# EAGLE board MCP3424 Temperature board (EAGLE 7.5.0)
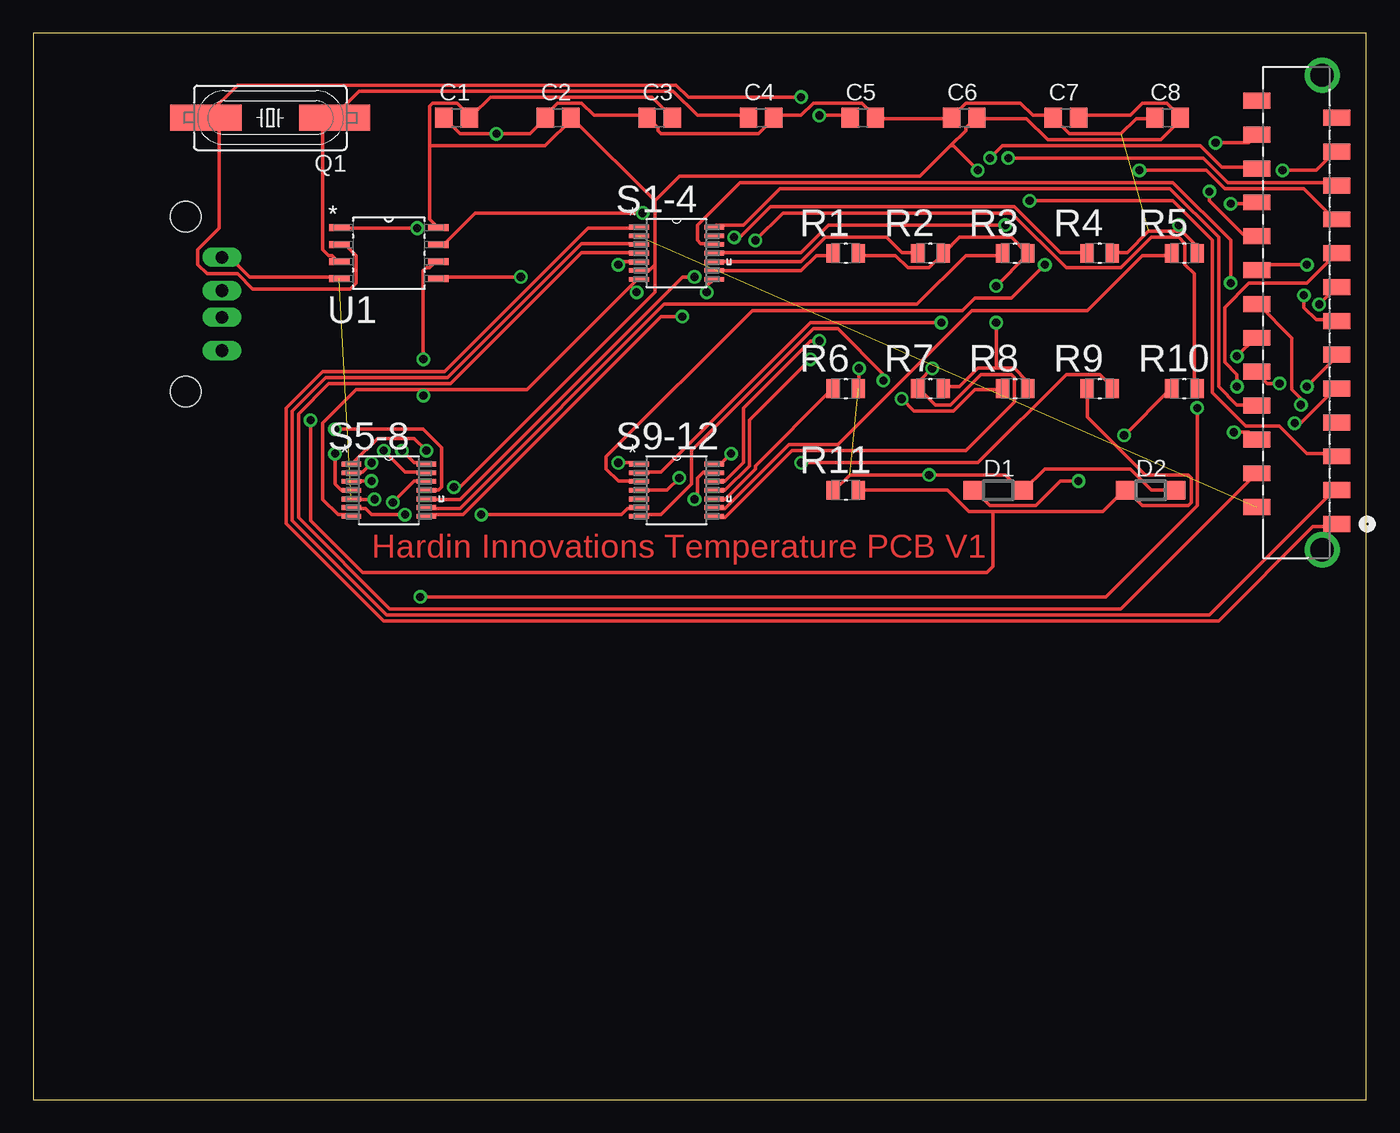
[diagram p0: board, top side]
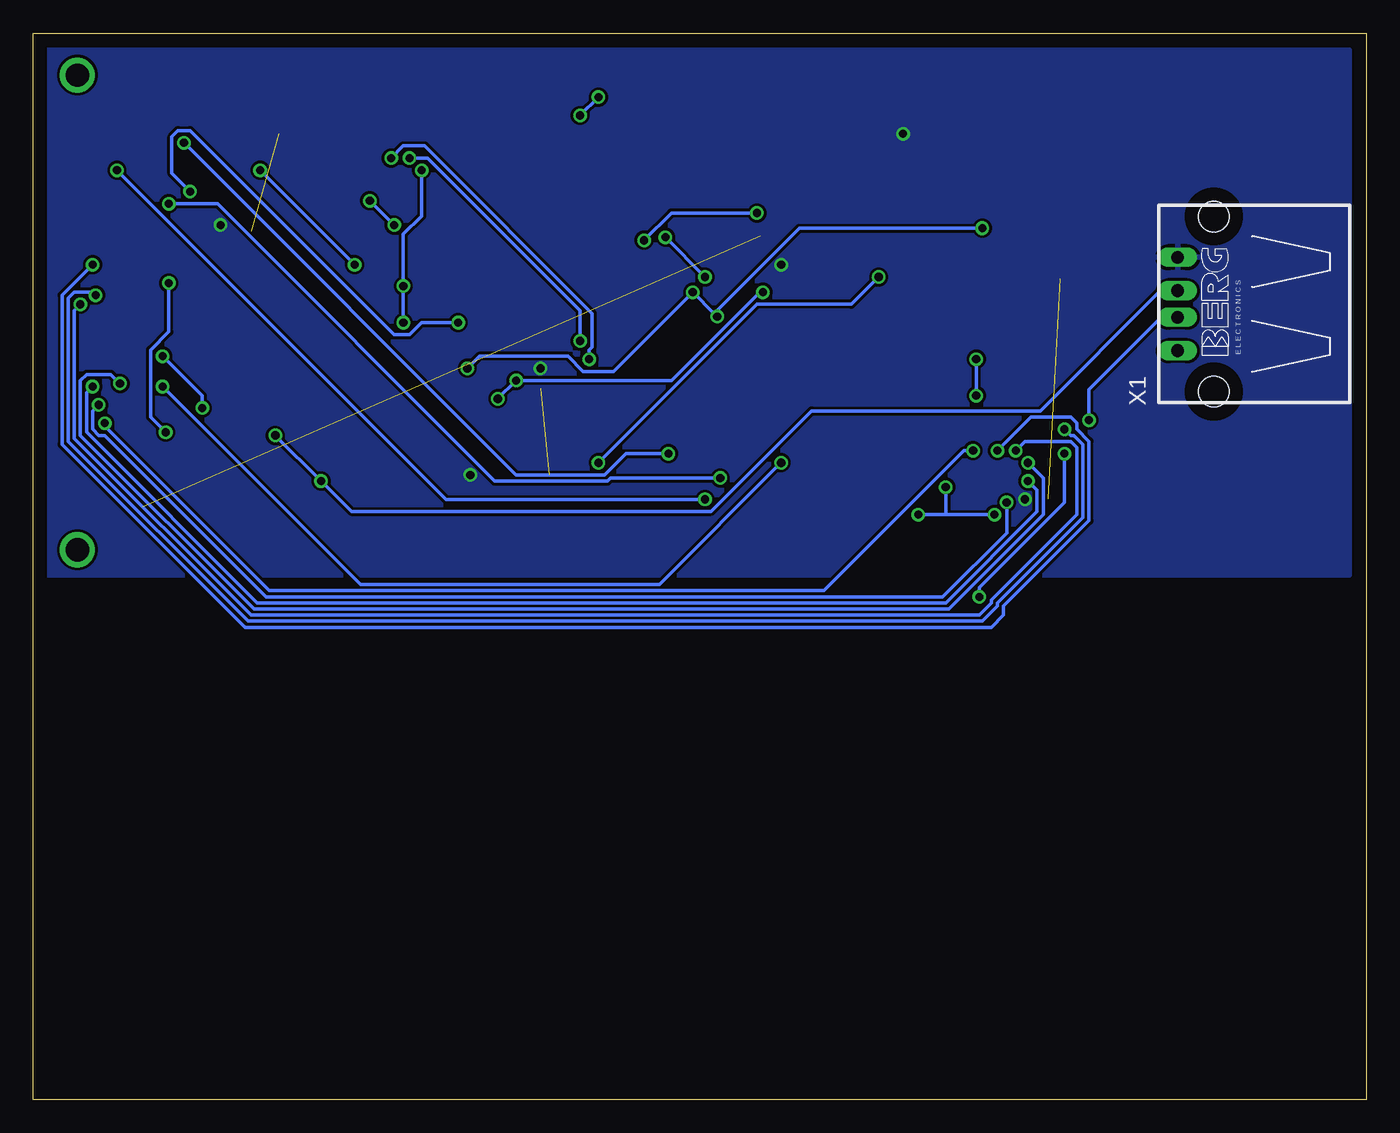
[diagram p1: board, bottom side, seen from below]

Size 100 x 80 mm. Coordinates in mm from the lower left corner, seen from the top.
Outline: 0,0 100,0 100,80 0,80 0,0
Copper layers (1*16): Top 0.035mm / dielectric 1.5mm / Bottom 0.035mm
Design rules "default": minimum track width 10mil, minimum drill 24mil, track to track 8mil, track to pad 8mil, pad to pad 8mil, via to via 8mil, smd to smd 8mil, copper to edge 40mil, drill to drill 8mil, minimum pad ring 10mil, minimum via ring 8mil, stop-mask expansion 4mil, vias tented up to drill 0mil, thermal gap 10mil

## Footprints (pad centres in the part's own frame; a part is rotated, then mirrored left to right if it is on the bottom)
C0805 = smd 1.3 x 1.5: 1 -0.95,0; 2 0.95,0
SOD123 = smd 1.4 x 1.4: A 1.9,0; C -1.9,0
MOLEX_90814-3926 = smd 1.194 x 2.007: 1 0,0; 2 1.27,5.994; 3 2.54,0; 4 3.81,5.994; 5 5.08,0; 6 6.35,5.994; 7 7.62,0; 8 8.89,5.994; 9 10.16,0; 10 11.43,5.994; 11 12.7,0; 12 13.97,5.994; 13 15.24,0; 14 16.51,5.994; 15 17.78,0; 16 19.05,5.994; 17 20.32,0; 18 21.59,5.994; 19 22.86,0; 20 24.13,5.994; 21 25.4,0; 22 26.67,5.994; 23 27.94,0; 24 29.21,5.994; 25 30.48,0; 26 31.75,5.994 | drill 1.753: 27 -1.93,1.092; 28 33.68,1.092
HC49UP = smd 5.334 x 1.93: 1 -4.826,0; 2 4.826,0
RESC2013X65N = smd 1.016 x 1.397: 1 -0.94,0; 2 0.94,0
SOP65P640X120-14N = smd 1.473 x 0.356: 1 -2.819,1.956; 2 -2.819,1.295; 3 -2.819,0.66; 4 -2.819,0; 5 -2.819,-0.66; 6 -2.819,-1.295; 7 -2.819,-1.956; 8 2.819,-1.956; 9 2.819,-1.295; 10 2.819,-0.66; 11 2.819,0; 12 2.819,0.66; 13 2.819,1.295; 14 2.819,1.956
SOIC127P798X216-8N = smd 1.549 x 0.533: 1 -3.708,1.905; 2 -3.708,0.635; 3 -3.708,-0.635; 4 -3.708,-1.905; 5 3.708,-1.905; 6 3.708,-0.635; 7 3.708,0.635; 8 3.708,1.905
PN87520 = drill 0.95 long: 1 -3.5,2.71; 2 -1,2.71; 3 1,2.71; 4 3.5,2.71 | hole 2.3: -6.57,0; 6.57,0

## Placement (x,y rotation side)
C1  .1uF  [C0805]  31.75,73.66 0 top
C2  .1uF  [C0805]  39.37,73.66 0 top
C3  .1uF  [C0805]  46.99,73.66 0 top
C4  22pF  [C0805]  54.61,73.66 0 top
C5  22pF  [C0805]  62.23,73.66 0 top
C6  10uF  [C0805]  69.85,73.66 0 top
C7  10uF  [C0805]  77.47,73.66 0 top
C8  10uF  [C0805]  85.09,73.66 0 top
D1  3.6V  [SOD123]  72.39,45.72 0 top
D2  3.6V  [SOD123]  83.82,45.72 0 top
HEADER  90814-3926  [MOLEX_90814-3926]  97.79,43.18 90 top
Q1  12Mhz  [HC49UP]  17.78,73.66 180 top
R1  10K Ohms  [RESC2013X65N]  60.96,63.5 0 top
R2  10K Ohms  [RESC2013X65N]  67.31,63.5 0 top
R3  10K Ohms  [RESC2013X65N]  73.66,63.5 0 top
R4  10K Ohms  [RESC2013X65N]  80.01,63.5 0 top
R5  10K Ohms  [RESC2013X65N]  86.36,63.5 0 top
R6  10K Ohms  [RESC2013X65N]  60.96,53.34 0 top
R7  10K Ohms  [RESC2013X65N]  67.31,53.34 0 top
R8  10K Ohms  [RESC2013X65N]  73.66,53.34 0 top
R9  68 Ohms  [RESC2013X65N]  80.01,53.34 0 top
R10  68 Ohms  [RESC2013X65N]  86.36,53.34 0 top
R11  2.2K Ohms  [RESC2013X65N]  60.96,45.72 0 top
S1-4  MCP3424-E/ST  [SOP65P640X120-14N]  48.26,63.5 0 top
S5-8  MCP3424-E/ST  [SOP65P640X120-14N]  26.67,45.72 0 top
S9-12  MCP3424-E/ST  [SOP65P640X120-14N]  48.26,45.72 0 top
U1  ATTINY45-20SU  [SOIC127P798X216-8N]  26.67,63.5 0 top
X1  5V  [PN87520]  11.43,59.69 90 bottom

## Library data of the parts
C1-C8 D1 D2 = sym
HEADER = Molex_By_element14_Batch_1; MPN: 90814-3926; OC_FARNELL: 1757067; OC_NEWARK: 34R6253; PACKAGE: CONN-26POS; SUPPLIER: Molex
Q1 = crystal; OC_FARNELL: unknown; OC_NEWARK: unknown
R1-R11 = Vishay_By_element14_Batch_1; MPN: P0805Z1002WNT0079; OC_FARNELL: 1791003; OC_NEWARK: 70R0101; SUPPLIER: Vishay; TOLERANCE: ± 0.05 %; WATTAGE: 200mW
S1-4 S5-8 S9-12 = Microchip_By_element14_Batch_1; MPN: MCP3424-E/ST; OC_FARNELL: 1630423; OC_NEWARK: 54M4872; PACKAGE: SOP-14; SUPPLIER: Microchip
U1 = Atmel_By_element14_Batch_1-00; MPN: ATTINY45-20SU; OC_FARNELL: 1288353; OC_NEWARK: 23M5073; PACKAGE: SOIC-8; SUPPLIER: Atmel
X1 = con-berg; OC_FARNELL: unknown; OC_NEWARK: unknown

## Nets
GND: C1.1 C2.1 C3.1 C4.2 C5.2 C6.1 C7.1 C8.1 D1.A D2.A R4.2 R5.2 R6.2 R11.1 S1-4.5 S5-8.5 U1.4 X1.4
N$1: HEADER.1 S1-4.1
N$2: S9-12.5
N$3: R1.1 S1-4.9
N$4: R2.1 S1-4.10
N$5: R3.1 S5-8.9
N$6: R4.1 S5-8.10
N$7: HEADER.3 S1-4.3
N$8: R5.1 S9-12.9
N$9: R6.1 S9-12.10
N$10: HEADER.5 S1-4.11
N$11: S1-4.13
N$12: HEADER.2 S1-4.2
N$13: HEADER.4 S1-4.4
N$14: HEADER.6 S1-4.12
N$15: HEADER.8 S1-4.14
N$16: HEADER.9 S5-8.1
N$17: HEADER.11 S5-8.3
N$18: HEADER.13 S5-8.11
N$19: HEADER.15 S5-8.13
N$20: HEADER.10 S5-8.2
N$21: HEADER.16 S5-8.14
N$22: HEADER.14 S5-8.12
N$23: HEADER.12 S5-8.4
N$24: HEADER.17 S9-12.1
N$25: HEADER.19 S9-12.3
N$26: HEADER.23 S9-12.13
N$27: HEADER.21 S9-12.11
N$28: HEADER.24 S9-12.14
N$29: HEADER.22 S9-12.12
N$30: HEADER.20 S9-12.4
N$31: HEADER.18 S9-12.2
N$33: R9.2 U1.5
N$34: R10.2 U1.7
N$35: D2.C R9.1 R11.2 X1.2
N$36: D1.C R10.1 X1.3
N$38: C4.1 Q1.1 U1.3
N$39: C5.1 Q1.2 U1.2
SCL: R7.1 S1-4.8 S5-8.8 S9-12.8 U1.1
SDA: R8.1 S1-4.7 S5-8.7 S9-12.7 U1.6
VDD: C1.2 C2.2 C3.2 C6.2 C7.2 C8.2 R1.2 R2.2 R3.2 R7.2 R8.2 S1-4.6 S5-8.6 S9-12.6 U1.8

## Tracks (layer width: path | path; a pad name or v marks a point on that pad's centre or on a via)
GND  (via drill 0.61)  (3 unrouted)
  Top 0.254: C1.1 30.86,73.61 32,72.47 v34.75,72.47 37.26,72.47 38.41,73.61 C2.1 38.41,73.84 39.32,74.75 41.15,74.75 42.06,73.84 45.95,73.84 C3.1 46.18,73.61 46.86,72.92 46.86,72.69 47.09,72.47 54.41,72.47 55.55,73.61 C4.2 55.78,73.84 57.61,73.84 58.52,74.75 62.18,74.75 63.09,73.84 C5.2 63.32,73.61 68.81,73.61 C6.1 69.04,73.84 69.95,74.75 74.07,74.75 74.98,73.84 76.35,73.84 C7.1 76.58,73.61 77.72,72.47 81.61,72.47 82.75,73.61 84.12,73.61 C8.1 | R11.1 60.12,45.72 61.27,46.86 v67.21,46.86 72.92,46.86 74.07,45.72 D1.A 75.89,47.32 82.3,47.32 83.9,45.72 D2.A | 85.95,65.15 86.18,65.15 87.1,64.24 87.1,63.55 R5.2 | 85.95,65.15 83.67,65.15 82.07,63.55 81.15,63.55 R4.2 | v61.95,54.86 61.95,53.49 R6.2 | v25.6,45.03 24,45.03 S5-8.5 | v43.89,62.64 44.12,62.87 45.26,62.87 S1-4.5 | U1.4 22.86,61.72 16.23,61.72 14.86,63.09 14.17,63.09 X1.4 | v85.95,65.61 85.95,65.15
  pour Bottom: 1.27,78.74 99.06,78.74 99.06,39.37 1.27,39.37
N$1
  Top 0.254: S1-4.1 45.26,65.38 41.6,65.38 30.86,54.63 21.72,54.63 18.97,51.89 18.97,43.2 26.29,35.89 88.92,35.89 96.01,42.98 97.61,42.98 HEADER.1
N$3
  Top 0.254: R1.1 59.89,63.32 58.75,63.32 57.61,62.18 51.21,62.18 S1-4.9
N$4
  Top 0.254: R2.1 66.29,63.55 65.15,63.55 64.01,64.69 59.44,64.69 57.61,62.87 51.21,62.87 S1-4.10
N$5
  Top 0.254: R3.1 72.69,63.32 69.95,63.32 66.29,59.66 47.32,59.66 32,44.35 29.49,44.35 S5-8.9
N$6  (via drill 0.61)
  Top 0.254: v52.58,64.69 53.03,64.69 55.32,66.98 73.61,66.98 77.04,63.55 78.87,63.55 R4.1 | v49.61,61.72 48.69,61.72 32,45.03 29.49,45.03 S5-8.10
  Bottom 0.254: v49.61,61.72 v52.58,64.69
N$7
  Top 0.254: S1-4.3 45.26,64.24 41.15,64.24 31.09,54.18 21.95,54.18 19.43,51.66 19.43,43.43 26.52,36.35 88.24,36.35 97.61,45.72 HEADER.3
N$8
  Top 0.254: R5.1 85.27,63.32 83.21,63.32 79.1,59.21 70.41,59.21 60.35,49.15 56.69,49.15 51.89,44.35 51.21,44.35 S9-12.9
N$9
  Top 0.254: R6.1 59.89,53.26 54.18,47.55 54.18,47.32 51.89,45.03 51.21,45.03 S9-12.10
N$10  (via drill 0.61)
  Top 0.254: v72.92,65.61 59.66,65.61 57.61,63.55 51.21,63.55 S1-4.11 | v74.75,67.44 85.5,67.44 88.47,64.47 88.47,53.03 90.98,50.52 93.5,50.52 95.56,48.46 97.61,48.46 HEADER.5
  Bottom 0.254: v74.75,67.44 v72.92,65.61
N$12  (1 unrouted)
N$13
  Top 0.254: HEADER.4 81.61,36.8 26.75,36.8 19.89,43.66 19.89,51.44 22.17,53.72 31.32,53.72 41.15,63.55 45.26,63.55 S1-4.4
N$14  (via drill 0.61)
  Top 0.254: v89.84,61.27 89.84,64.47 85.5,68.81 53.03,68.81 49.84,65.61 49.84,64.47 50.06,64.24 50.98,64.24 S1-4.12 | v90.07,50.06 91.21,50.06 91.67,49.61 HEADER.6
  Bottom 0.254: v89.84,61.27 89.84,57.61 91.21,56.24 91.21,51.21 v90.07,50.06
N$15
  Top 0.254: S1-4.14 51.21,65.61 53.26,65.61 56.01,68.35 85.27,68.35 88.92,64.69 88.92,53.49 90.3,52.12 91.67,52.12 HEADER.8
N$16  (via drill 0.61)
  Top 0.254: v29.49,48.69 28.57,49.61 25.83,49.61 24,47.78 S5-8.1 | v94.64,50.75 95.1,50.75 97.61,53.26 HEADER.9
  Bottom 0.254: v29.49,48.69 30.18,48.69 40.69,38.18 82.3,38.18 94.64,50.52 v94.64,50.75
N$17  (via drill 0.61)
  Top 0.254: v25.38,46.41 24,46.41 S5-8.3 | v95.56,53.49 97.84,55.78 HEADER.11
  Bottom 0.254: v25.38,46.41 24.69,45.72 24.69,44.12 31.55,37.26 83.21,37.26 96.01,50.06 96.01,53.03 v95.56,53.49
N$18  (via drill 0.61)
  Top 0.254: S5-8.11 30.4,45.72 30.63,45.95 30.63,48.92 29.26,50.29 v22.63,50.29 | v95.33,60.35 95.33,59.44 96.24,58.52 97.61,58.52 HEADER.13
  Bottom 0.254: v22.63,50.29 22.17,49.84 21.95,49.84 21.26,49.15 21.26,43.66 27.66,37.26 27.66,37.03 28.8,35.89 83.9,35.89 97.38,49.38 97.38,60.12 96.93,60.58 95.56,60.58 v95.33,60.35
N$19  (via drill 0.61)
  Top 0.254: v26.29,48.69 27.89,47.09 29.49,47.09 S5-8.13 | v96.47,59.66 97.61,60.81 HEADER.15
  Bottom 0.254: v26.29,48.69 25.6,49.38 22.17,49.38 21.72,48.92 21.72,43.89 28.12,37.49 28.12,37.26 29.03,36.35 83.67,36.35 96.93,49.61 96.93,59.21 v96.47,59.66
N$20  (via drill 0.61)
  Top 0.254: v25.38,47.78 24.69,47.09 24,47.09 S5-8.2 | v93.5,53.72 92.58,53.72 91.9,54.41 HEADER.10
  Bottom 0.254: v25.38,47.78 24.23,46.63 24.23,43.89 31.32,36.8 83.44,36.8 96.47,49.84 96.47,53.95 96.01,54.41 94.18,54.41 v93.5,53.72
N$21  (via drill 0.61)
  Top 0.254: v27.66,48.69 28.57,47.78 29.49,47.78 S5-8.14 | v95.56,62.64 92.13,62.64 91.9,62.41 HEADER.16
  Bottom 0.254: v27.66,48.69 25.15,51.21 22.17,51.21 21.72,50.75 21.72,50.29 20.8,49.38 20.8,43.43 27.2,37.03 27.2,36.35 28.12,35.43 84.12,35.43 97.84,49.15 97.84,60.35 v95.56,62.64
N$22  (via drill 0.61)
  Top 0.254: v26.98,44.81 28.57,46.41 29.49,46.41 S5-8.12 | v95.1,52.12 95.1,52.58 94.41,53.26 94.41,57.15 91.9,59.66 HEADER.14
  Bottom 0.254: v26.98,44.81 26.98,42.52 31.77,37.72 82.53,37.72 94.64,49.84 95.1,49.84 95.56,50.29 95.56,51.66 v95.1,52.12
N$23  (via drill 0.61)
  Top 0.254: S5-8.4 23.09,45.72 22.63,46.18 v22.63,48.46 | v29.03,37.72 80.47,37.72 87.33,44.58 v87.33,51.89 | v90.3,55.78 91.67,57.15 HEADER.12
  Bottom 0.254: v22.63,48.46 22.63,44.81 29.03,38.41 v29.03,37.72 | v87.33,51.89 87.33,52.81 v90.3,55.78
N$24  (via drill 0.61)
  Top 0.254: v43.89,47.78 45.26,47.78 S9-12.1 | v90.3,53.49 90.3,54.41 89.38,55.32 89.38,59.44 91.21,61.27 95.56,61.27 HEADER.17
  Bottom 0.254: v43.89,47.78 53.03,38.63 75.44,38.63 v90.3,53.49
N$25  (via drill 0.61)
  Top 0.254: v75.89,62.64 73.38,60.12 70.64,60.12 69.72,59.21 53.95,59.21 42.98,48.23 42.98,47.32 43.89,46.41 45.26,46.41 S9-12.3 | v82.98,69.72 88.01,69.72 89.38,68.35 95.33,68.35 97.61,66.06 HEADER.19
  Bottom 0.254: v82.98,69.72 v75.89,62.64
N$26  (via drill 0.61)
  Top 0.254: v49.61,45.03 49.84,45.26 49.84,46.63 50.29,47.09 50.98,47.09 S9-12.13 | v93.73,69.72 96.24,69.72 97.61,71.09 HEADER.23
  Bottom 0.254: v49.61,45.03 69.04,45.03 v93.73,69.72
N$27  (via drill 0.61)
  Top 0.254: S9-12.11 51.89,45.72 53.72,47.55 53.72,50.98 v58.29,55.55 | v73.15,70.64 87.78,70.64 89.61,68.81 97.38,68.81 97.61,68.58 HEADER.21
  Bottom 0.254: v58.29,55.55 58.29,56.24 58.06,56.46 58.06,58.98 70.64,71.55 72.24,71.55 v73.15,70.64
N$28  (via drill 0.61)
  Top 0.254: v52.35,48.46 51.66,47.78 51.21,47.78 S9-12.14 | v88.7,71.78 91.21,71.78 91.67,72.24 HEADER.24
  Bottom 0.254: v52.35,48.46 55.55,48.46 57.15,46.86 63.78,46.86 v88.7,71.78
N$29  (via drill 0.61)
  Top 0.254: v58.98,56.92 58.29,56.92 53.26,51.89 53.26,47.78 51.89,46.41 51.21,46.41 S9-12.12 | v71.78,70.64 72.69,71.55 87.55,71.55 89.15,69.95 91.67,69.95 HEADER.22
  Bottom 0.254: v58.98,56.92 58.98,59.21 70.41,70.64 v71.78,70.64
N$30  (via drill 0.61)
  Top 0.254: S9-12.4 47.55,45.72 v48.46,46.63 | v89.84,67.21 91.67,67.21 HEADER.20
  Bottom 0.254: v48.46,46.63 56.69,46.63 56.92,46.41 65.38,46.41 86.18,67.21 v89.84,67.21
N$31  (via drill 0.61)
  Top 0.254: v68.12,58.29 58.29,58.29 47.09,47.09 45.49,47.09 S9-12.2 | v88.24,68.12 88.24,67.44 90.75,64.92 91.67,64.92 HEADER.18
  Bottom 0.254: v68.12,58.29 70.87,58.29 71.78,57.38 72.92,57.38 88.24,72.69 89.15,72.69 89.61,72.24 89.61,69.49 v88.24,68.12
N$33  (via drill 0.61)
  Top 0.254: v57.61,47.78 70.87,47.78 77.5,54.41 80.01,54.41 80.92,53.49 R9.2 | v36.58,61.72 30.4,61.72 U1.5
  Bottom 0.254: v57.61,47.78 45.72,59.66 38.63,59.66 v36.58,61.72
N$34  (via drill 0.61)
  Top 0.254: v54.18,64.47 56.24,66.52 73.38,66.52 77.5,62.41 81.61,62.41 83.9,64.69 85.95,64.69 86.41,64.24 86.41,62.64 87.1,61.95 87.1,53.49 R10.2 | v45.72,66.52 33.15,66.52 30.86,64.24 30.4,64.24 U1.7
  Bottom 0.254: v54.18,64.47 52.12,66.52 v45.72,66.52
N$35  (via drill 0.61)
  Top 0.254: R11.2 68.58,45.72 70.18,44.12 72.01,44.12 | 72.01,44.12 80.24,44.12 81.84,45.72 D2.C 82.07,45.72 83.21,44.58 86.64,44.58 86.87,44.81 86.87,46.63 86.64,46.86 83.44,46.86 79.1,51.21 79.1,53.26 R9.1 | v20.8,50.98 20.8,43.43 24.69,39.55 71.55,39.55 72.01,40.01 72.01,44.12
  Bottom 0.254: v20.8,50.98 20.8,53.26 15.54,58.52 14.17,58.52 X1.2
N$36  (via drill 0.61)
  Top 0.254: v81.84,49.84 85.27,53.26 R10.1 | v78.41,46.41 77.04,46.41 75.21,44.58 71.78,44.58 70.64,45.72 D1.C
  Bottom 0.254: v81.84,49.84 v78.41,46.41 76.12,44.12 49.15,44.12 41.6,51.66 24.46,51.66 15.54,60.58 14.17,60.58 X1.3
N$38
  Top 0.254: C4.1 53.49,73.84 49.84,73.84 48.01,75.67 24.46,75.67 22.63,73.84 Q1.1 22.4,73.61 21.72,72.92 21.72,63.78 22.17,63.32 22.4,63.32 22.86,62.87 U1.3
N$39  (via drill 0.61)
  Top 0.254: v58.98,73.84 61.27,73.84 C5.1 | v57.61,75.21 49.15,75.21 48.23,76.12 15.32,76.12 13.03,73.84 Q1.2 13.03,73.61 13.95,72.69 13.95,65.38 12.34,63.78 12.34,62.64 13.03,61.95 15.32,61.95 16.46,60.81 23.77,60.81 24.23,61.27 24.23,63.32 23.55,64.01 23.09,64.01 U1.2
  Bottom 0.254: v57.61,75.21 v58.98,73.84
SCL  (via drill 0.61)
  Top 0.254: S9-12.8 51.21,43.66 51.89,43.66 56.92,48.69 69.95,48.69 73.61,52.35 73.61,54.18 73.38,54.41 71.09,54.41 68.81,52.12 67.67,52.12 66.52,53.26 R7.1 66.52,53.49 66.52,53.95 v67.44,54.86 | v48.69,58.75 47.09,58.75 32.23,43.89 29.49,43.89 S5-8.8 | v50.52,60.58 50.52,61.04 50.98,61.49 S1-4.8 | v28.8,65.38 23.09,65.38 U1.1
  Bottom 0.254: 48.92,58.98 v50.52,60.58 56.46,54.63 58.75,54.63 59.89,55.78 66.52,55.78 v67.44,54.86 | v28.8,65.38 42.52,65.38 48.92,58.98 | 48.92,58.98 v48.69,58.75
SDA  (via drill 0.61)
  Top 0.254: v65.15,52.58 66.06,51.66 69.04,51.66 70.64,53.26 72.69,53.26 R8.1 | v63.78,53.95 63.78,54.41 60.35,57.84 58.52,57.84 49.38,48.69 49.38,46.18 47.09,43.89 45.49,43.89 S9-12.7 | 29.26,53.26 37.03,53.26 44.81,61.04 | 29.26,53.26 24.23,53.26 21.72,50.75 21.72,45.03 22.86,43.89 23.77,43.89 S5-8.7 | 44.81,61.04 45.26,61.49 S1-4.7 | v29.26,55.55 29.26,62.18 29.49,62.41 29.72,62.41 30.18,62.87 U1.6 | 29.26,53.26 v29.26,52.81 | 44.81,61.04 v45.26,60.58
  Bottom 0.254: v65.15,52.58 v63.78,53.95 52.12,53.95 45.49,60.58 v45.26,60.58 | v29.26,52.81 v29.26,55.55
VDD  (via drill 0.61)
  Top 0.254: 29.72,71.55 29.72,66.06 U1.8 | 29.72,71.55 29.72,74.52 29.95,74.75 31.77,74.75 32.69,73.84 C1.2 32.92,73.84 34.29,75.21 46.41,75.21 47.78,73.84 C3.2 | 72.24,54.86 73.61,54.86 74.52,53.95 74.52,53.49 R8.2 | 72.24,54.86 70.87,54.86 69.49,53.49 68.35,53.49 R7.2 | R1.2 61.95,63.32 64.69,63.32 65.61,62.41 67.21,62.41 68.12,63.32 R2.2 68.35,63.55 69.49,64.69 73.38,64.69 74.52,63.55 R3.2 74.52,63.32 v72.24,61.04 | v72.24,58.29 72.24,54.86 | v27.89,43.89 25.38,43.89 24.92,44.35 24,44.35 S5-8.6 | v33.6,43.89 44.12,43.89 44.58,44.35 45.26,44.35 S9-12.6 | C7.2 78.64,73.84 82.3,73.84 83.21,74.75 85.04,74.75 85.95,73.84 C8.2 86.18,73.61 84.58,72.01 76.12,72.01 74.52,73.61 70.87,73.61 C6.2 70.64,73.61 69.95,72.92 69.95,72.69 68.81,71.55 | 46.63,62.64 46.18,62.18 45.49,62.18 S1-4.6 | 46.63,67.44 46.63,62.64 | 40.46,73.61 46.63,67.44 | 68.81,71.55 66.52,69.27 48.46,69.27 46.63,67.44 | v31.55,45.95 32,45.95 46.63,60.58 46.63,62.64 | v70.87,69.72 69.04,71.55 68.81,71.55 | 29.72,71.55 38.41,71.55 40.46,73.61 | 40.46,73.61 C2.2
  Bottom 0.254: v72.24,58.29 v72.24,61.04 72.24,64.92 70.87,66.29 v70.87,69.72 | v33.6,43.89 31.55,43.89 | 31.55,43.89 v27.89,43.89 | v31.55,45.95 31.55,43.89

## Text on the board
Top: Hardin Innovations Temperature PCB V1